# Altium PCB pcb.PcbDoc
Units mil, origin at the board's own origin, x right, y up, seen from the top; angles counter-clockwise.
Board outline 3228.88 x 3228.88 mil, 2 copper layers (Top Layer, Bottom Layer); 53 components, 59 nets, 259 pads, 127 vias.
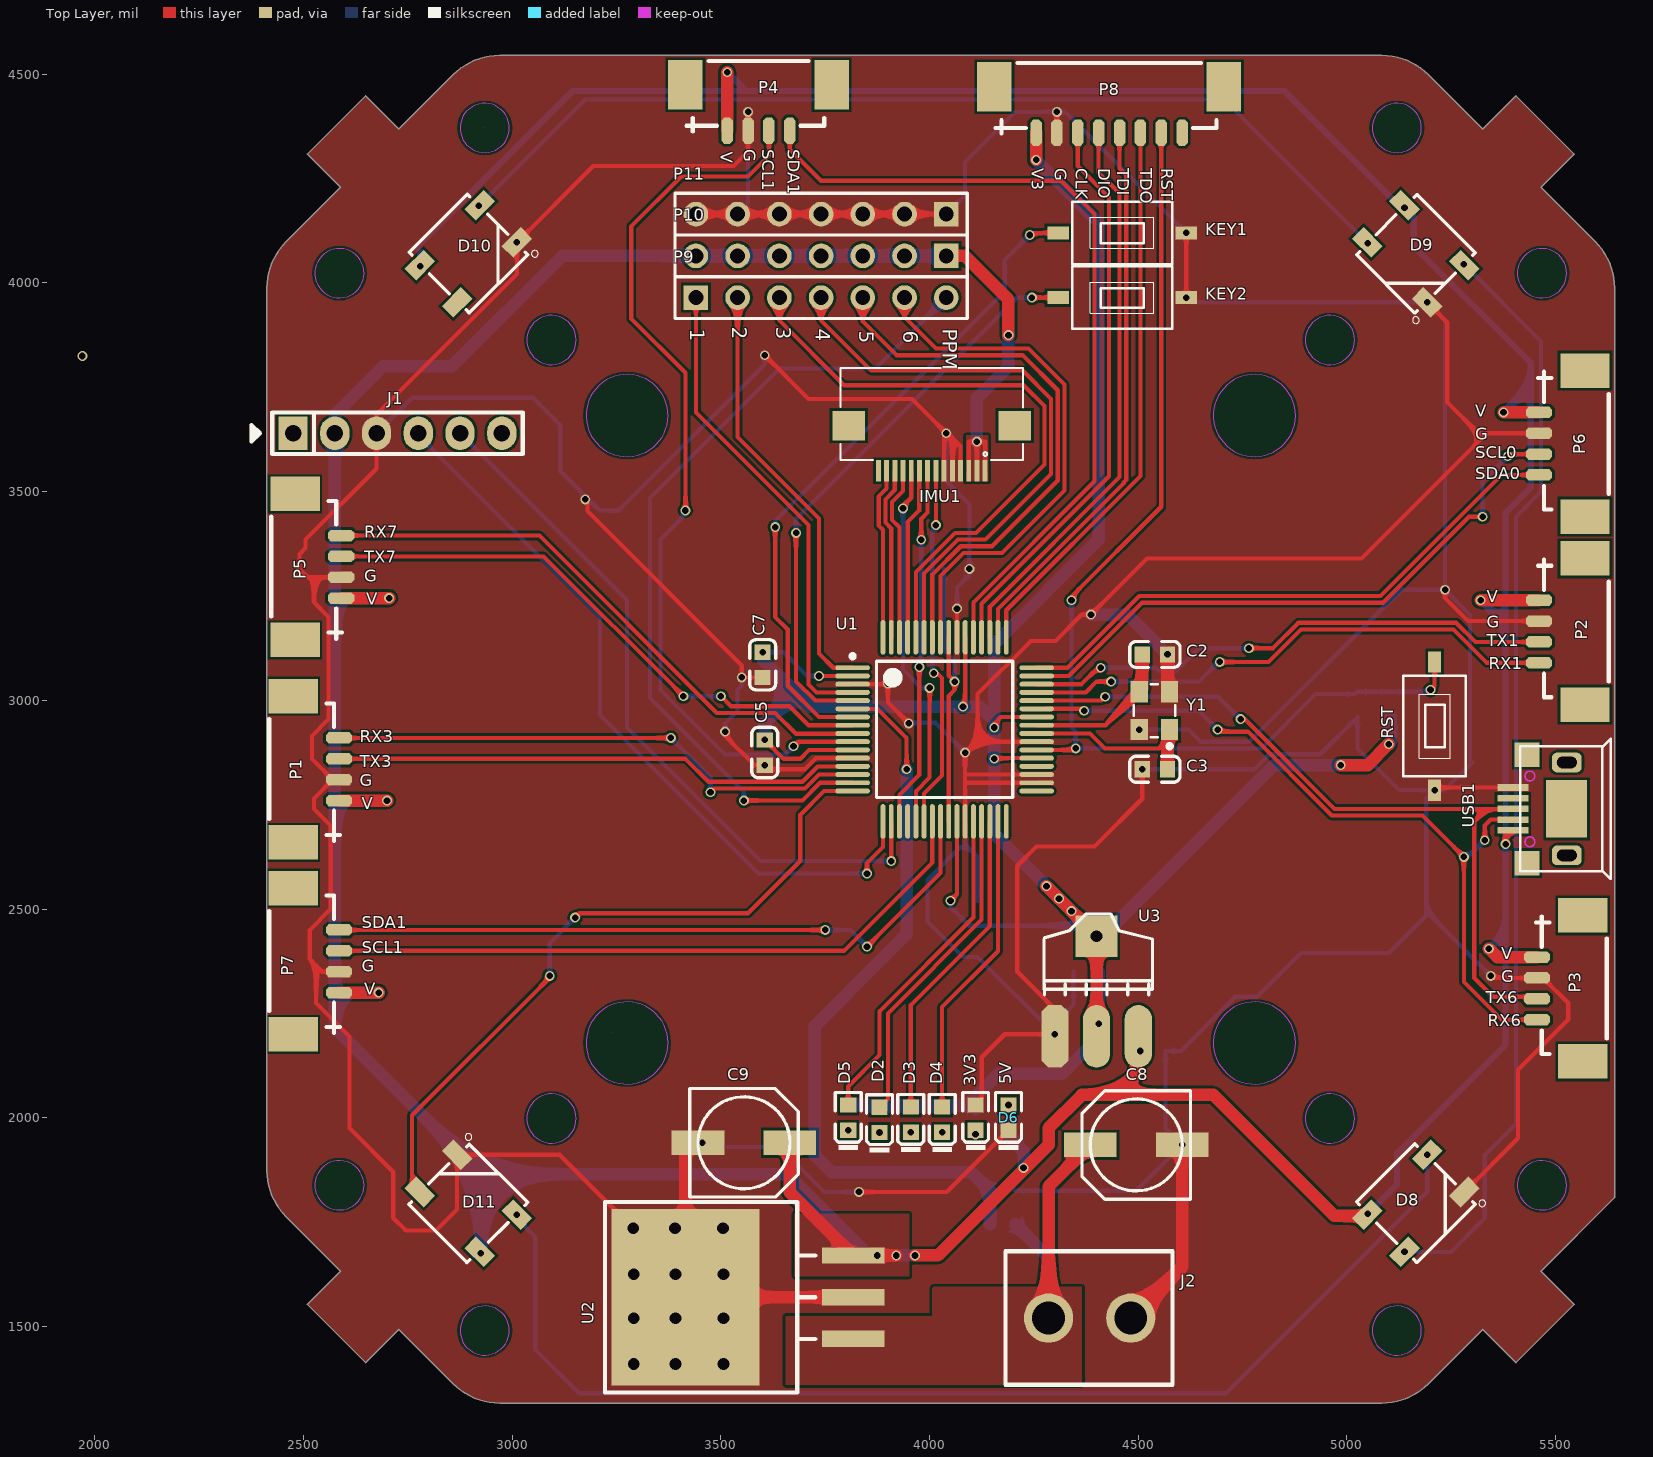
[diagram p0: Top Layer view]
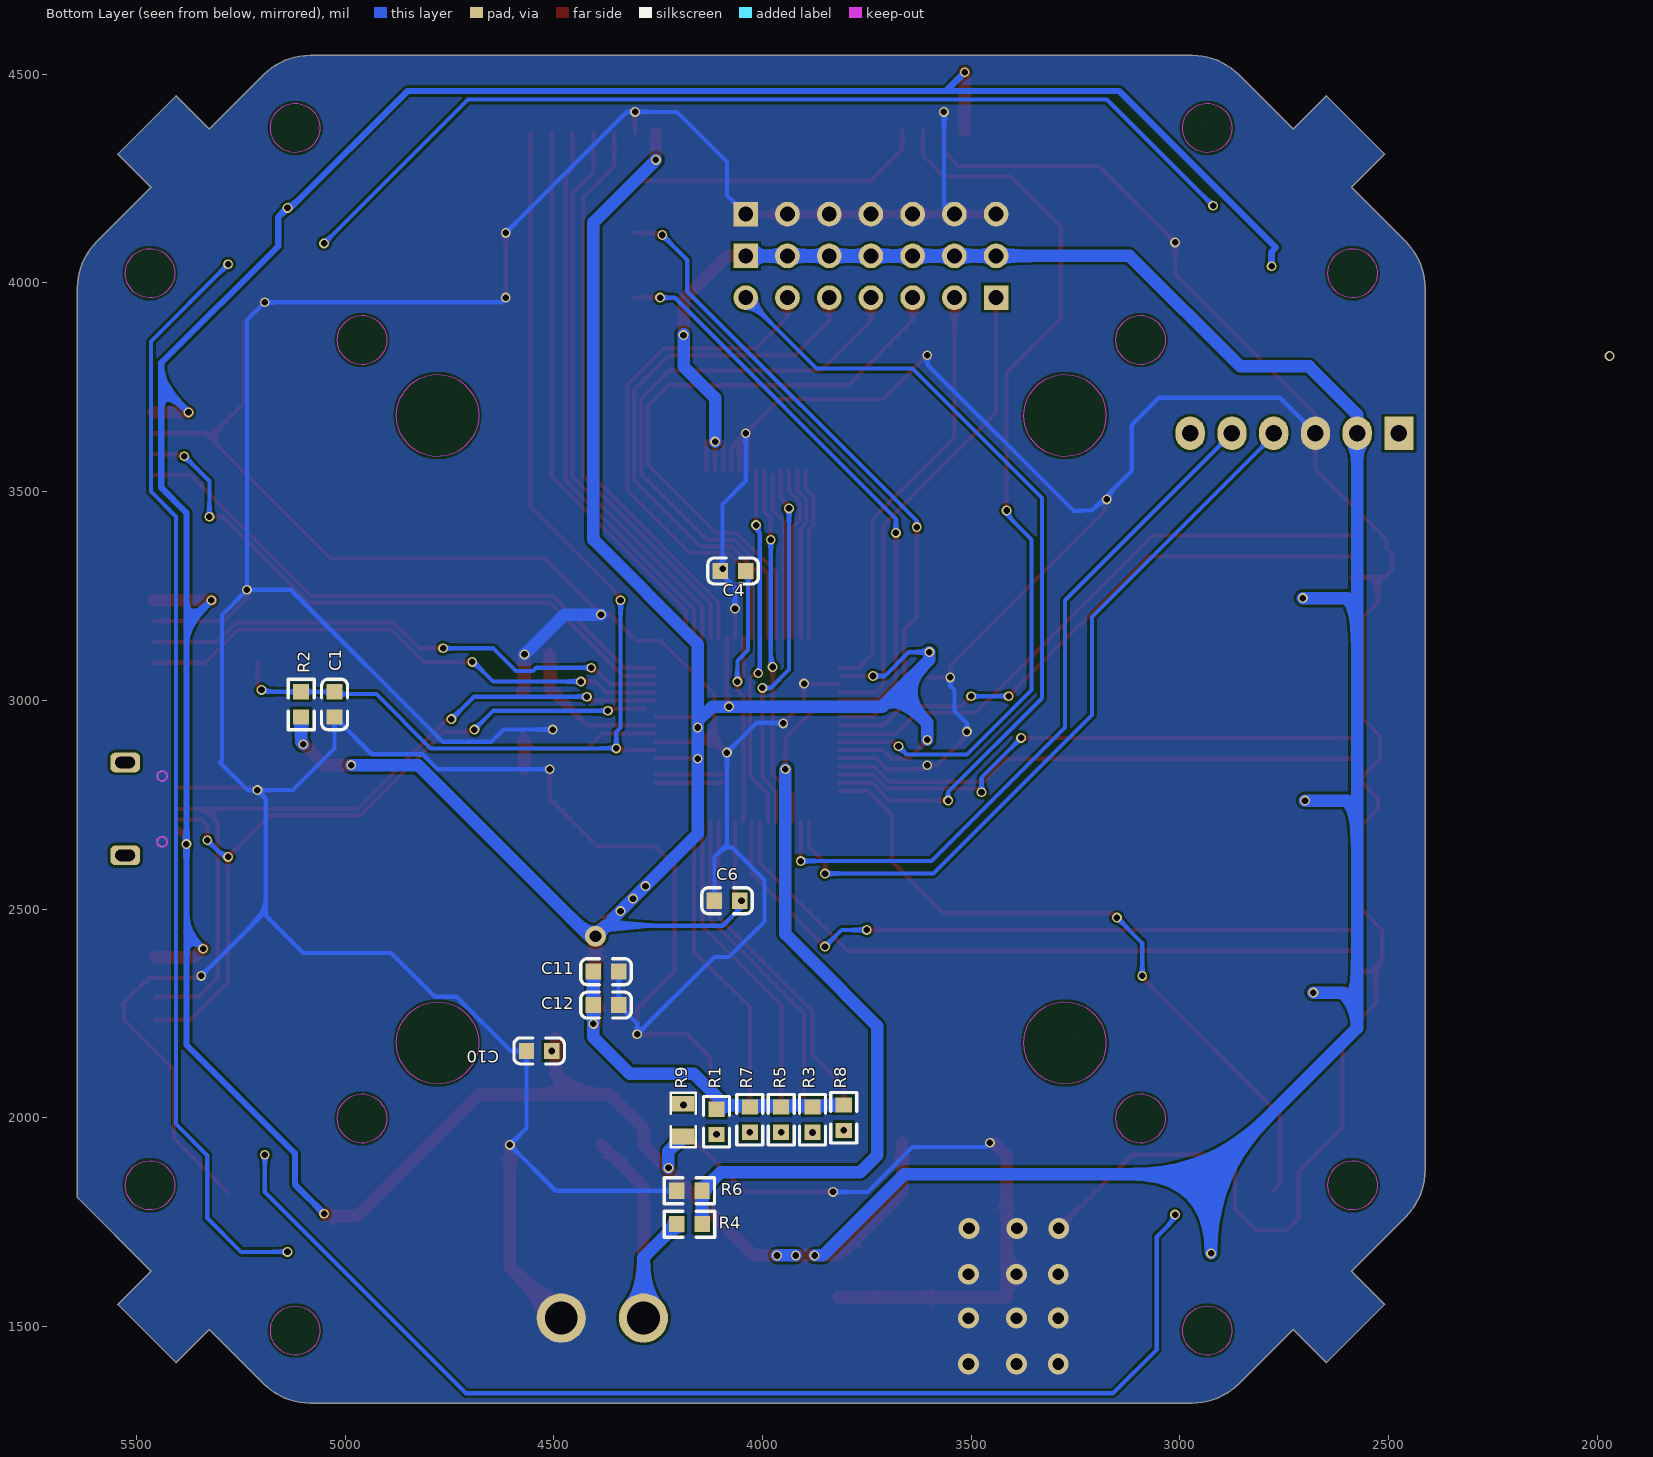
[diagram p1: Bottom Layer view, seen from below]
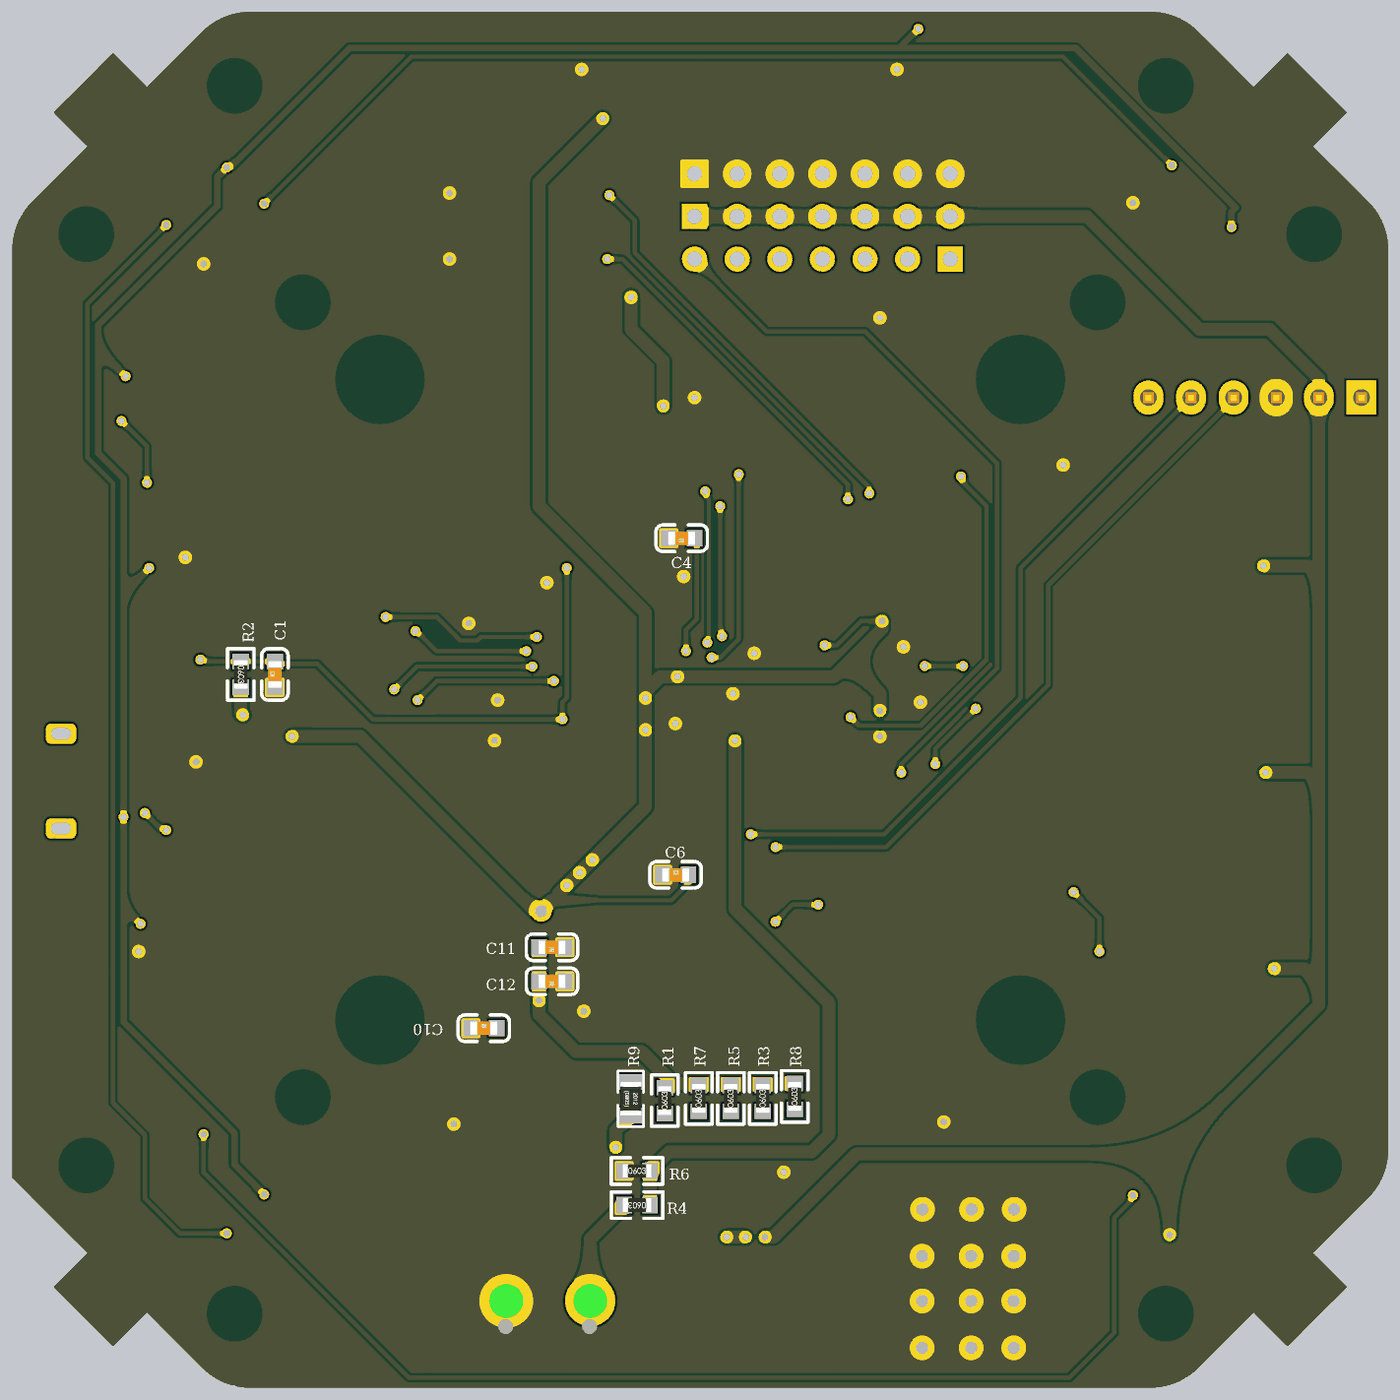
[diagram p2: 3D render of the assembled board from below, using the file's embedded part models]

## Layer stack, top to bottom
Top Solder: solder mask 0.4, Solder Resist, Dk 3.5
Top Layer: signal copper 1.4
Dielectric 1: dielectric 12.6, FR-4, Dk 4.8
Bottom Layer: signal copper 1.4
Bottom Solder: solder mask 0.4, Solder Resist, Dk 3.5

## Board outline
2509.3,1552.63 cw(c2509.49,1552.82) 2509.3,1553 2588.62,1632.33 2458.47,1762.48 cw(c2570.01,1874.02) 2412.27,1874.02 2412.27,3987.66 cw(c2570.01,3987.66) 2458.47,4099.2 2588.62,4229.35 2509.3,4308.68 cw(c2509.49,4308.86) 2509.3,4309.05 2648.5,4448.25 cw(c2648.68,4448.06) 2648.87,4448.25 2728.19,4368.93 2858.34,4499.08 cw(c2858.53,4498.89) 2858.39,4499.12 cw(c2969.89,4387.53) 2969.89,4545.28 5083.52,4545.28 cw(c5083.52,4387.53) 5195.07,4499.08 5325.22,4368.92 5404.54,4448.25 cw(c5404.73,4448.06) 5404.92,4448.25 5544.11,4309.05 cw(c5543.92,4308.86) 5544.19,4308.86 cw(c5543.92,4308.86) 5544.11,4308.68 5464.79,4229.35 5594.94,4099.2 cw(c5483.4,3987.66) 5641.14,3987.66 5641.14,1808.79 cw(c5640.88,1808.79) 5641.07,1808.61 5464.79,1632.33 5544.11,1553 cw(c5543.92,1552.82) 5544.19,1552.82 cw(c5543.92,1552.82) 5544.11,1552.63 5404.92,1413.44 cw(c5404.73,1413.62) 5404.54,1413.44 5325.22,1492.76 5195.07,1362.6 cw(c5083.52,1474.15) 5083.52,1316.4 2969.89,1316.4 cw(c2969.89,1474.15) 2858.35,1362.6 2728.19,1492.76 2648.87,1413.44 cw(c2648.68,1413.62) 2648.5,1413.44
cut-out: 3240,2205
cut-out: 2890,4410
cut-out: 2934.02,4371.5
cut-out: 2934.02,4371.5
cut-out: 2934.02,4371.5

## Design rules (kind name [scope] priority, off if disabled: settings)
Clearance [All] p1: gap=6 ignorepadtopadclearanceinfootprint=TRUE except(0: Text-Text)
ComponentClearance [All] p1: gap=0 collisioncheckmode=3 verticalgap=0 showdistances=FALSE
MinimumSolderMaskSliver [All] p1: minsoldermaskwidth=1
PolygonConnect [All] p1: connectstyle=Direct reliefconductorwidth=10 reliefentries=4 polygonreliefangle="90 Angle" airgapwidth=10
RoutingVias [All] p1: holewidth=23.62 width=23.62 viastyle="Through Hole" minholewidth=15.75 minwidth=23.62 maxholewidth=100 maxwidth=100
SilkToSilkClearance [All] p1: silktosilkclearance=0
SilkToSolderMaskClearance [IsPad] p1: minsilkscreentomaskgap=0 clearancetoexposedcopper=TRUE
SolderMaskExpansion [All] p1: expansion=4
UnRoutedNet [All] p1: checkbadconnections=TRUE
Width [All] p1: maxlimit=100 minlimit=6 preferedwidth=10 minimp=50.000000 maximp=50.000000 favimp=50.000000
25 further rules are at their usual default settings.

## Classes and differential pairs
component class 电源: C8 C9 C10 C11 C12 D6 D8 D9 D10 D11 J2 R9 U2 U3
component class TM4C123GH6PM_1: C1 C2 C3 C4 C5 C6 C7 D1 D2 D3 D4 D5 IMU1 J1 KEY1 KEY2 P1 P2 P3 P4 P5 P6 P7 P8 P9 P10 P11 R1 R2 R3 R4 R5 R6 R7 R8 RST U1 USB1 Y1 Y?

## Components (designator, comment, footprint, x,y, rotation, side; value= is the part's Value field where it differs from the comment)
C1 "100nF" 0603_C 5025,2990.31 r90 bottom
C2 "22pF" 0603_C 4539.69,3110 r0 top
C3 "22pF (220) 5% 50V" 0603_C 4539.69,2835 r180 top
C4 "100nF (104) 10% 50V" 0603_C 4070.31,3310 r0 bottom
C5 "100nF" 0603_C 3605,2875 r90 top
C6 "100nF" 0603_C 4084.68,2520 r180 bottom
C7 "100nF" 0603_C 3600,3085.31 r90 top
C8 "470uF" CC6.56.5 4495,1935 r0 top
C9 "470uF" CC6.56.5 3555.24,1940 r180 top
C10 "10uF" 0603_C 4534.69,2160 r180 bottom
C11 "10uF" 0603_C 4374.69,2350 r0 bottom
C12 "100nF" 0603_C 4374.69,2270 r0 bottom
D1 "白灯 0603" 0603_LED_S1 4110.21,2000.31 r90 top
D2 "红灯 0603" 0603_LED_S1 3880,1995 r90 top
D3 "绿灯 0603" 0603_LED_S1 3955,1995.31 r90 top
D4 "蓝灯 0603" 0603_LED_S1 4030,1995.31 r90 top
D5 "黄灯 0603" 0603_LED_S1 3805,2000.31 r90 top
D6 "蓝灯 0603" 0603_LED_S1 4188.95,2000.31 r90 top
D8 "WS2812B" WS2812B 5165,1795 r225 top locked
D9 "WS2812B" WS2812B 5165,4070 r135 top locked
D10 "WS2812B" WS2812B 2895,4070 r225 top locked
D11 "WS2812B" WS2812B 2895,1795 r315 top locked
IMU1 "FPC-0.5-14" FPC-0.5-14 4005.16,3550 r180 top
J1 "HDR1x6" PIN-6-2.54-1.0 2725,3640 r0 top
J2 "HDR1x2" Head_Small 4383.43,1520 r270 top
KEY1 "KEY_M" KEY_SOP3625 4307.91,4120 r0 top
KEY2 "KEY_M" KEY_SOP3625 4307.91,3965 r0 top
P1 "MOLEX" "1.25 molex" 2530,2835 r270 top
P2 "MOLEX" "1.25 molex" 5515,3165 r90 top
P3 "MOLEX" "1.25 molex" 5510,2310 r90 top
P4 "MOLEX" "1.25 molex" 3590,4420 r180 top
P5 "MOLEX" "1.25 molex" 2535,3320 r270 top
P6 "MOLEX" "1.25 molex" 5515,3615 r90 top
P7 "MOLEX" "1.25 molex" 2530,2375 r270 top
P8 "MOLEX" "1.25 molex -8" 4330,4415 r180 top
P9 "Header 7" HDR1X7 3440,3965 r0 top
P10 "Header 7" HDR1X7 4040,4065 r180 top
P11 "Header 7" HDR1X7 4040,4165 r180 top
R1 "470Ω (4700) ±1%" 0603_R 4110,1990.31 r90 bottom
R2 "10KΩ" 0603_R 5105,2990.32 r270 bottom
R3 "470Ω" 0603_R 3880,1995.31 r90 bottom
R4 "10KΩ" 0603_R 4174.68,1745 r0 bottom
R5 "470Ω" 0603_R 3955,1995.31 r90 bottom
R6 "1KΩ" 0603_R 4175,1825 r180 bottom
R7 "470Ω" 0603_R 4030,1995.31 r90 bottom
R8 "470Ω" 0603_R 3805,2000 r90 bottom
R9 "1K" 0805_R 4190,1994.37 r270 bottom
RST "KEY_M" KEY_SOP3625 5210,2785 r90 top
U1 "TM4C123GH6PMT7R" PM0064A_M 4036,2930.5 r0 top locked value=Value
U2 "UCC283-3_KTT_3" TO-263-3 3415,1570 r90 top value=Value
U3 "AMS1117-3.3" AMS1117 4299.97,2195.06 r0 top
USB1 "USB-AB" "USB_AB - 5S - B" 5611.42,2740 r270 top
Y1 "25Mhz" XTAL3225 4575,2930.08 r90 top

## Footprints (in the part's own frame and the unit in brackets; to place one, negate y for a bottom-side part, rotate by r counter-clockwise, add the part's x,y. Pads: shape width x height; smd on the part's side, far side on the other; paste and mask are expansions set on the pad)
"1.25 molex" [mm]
  oct 0.7x1.6 smd: 1(1.905,1.397) 2(0.635,1.397) 3(-0.635,1.397) 4(-1.905,1.397)
  rect 2.1x3 smd: 5(-4.445,-1.397) 6(4.445,-1.397)
  silkscreen extent -4,-2.85 4.37,1.45, body extent -5.45,-2.88 5.45,0.95, height 2.8
"1.25 molex -8" [mm]
  oct 0.7x1.6 smd: 1(1.905,1.397) 2(0.635,1.397) 3(-0.635,1.397) 4(-1.905,1.397) 5(-3.175,1.397) 6(-4.445,1.397) 7(-5.715,1.397) 8(-6.985,1.397)
  rect 2.1x3 smd: 9(-9.525,-1.397) 10(4.445,-1.397)
  silkscreen extent -9.08,-2.85 4.37,1.45, body extent -10.54,-2.88 5.45,0.95, height 2.8
0603_C [mm]
  rect 0.93x0.98 smd: 1(-0.77,0) 2(0.77,0)
  silkscreen extent -1.53,-0.79 1.54,0.79, body extent -0.8,-0.4 0.8,0.4, height 0.3
0603_LED_S1 [mm]
  rect 0.93x0.98 smd: A(0.77,0) K(-0.77,0)
  silkscreen extent -1.98,-0.79 1.54,0.79, body extent -0.8,-0.4 0.8,0.4, height 0.6
0603_R [mm]
  rect 0.93x0.98 smd: 1(-0.77,0) 2(0.77,0)
  silkscreen extent -1.54,-0.79 1.54,0.79, body extent -0.85,-0.4 0.85,0.4, height 0.56
0805_R [mm] "SMD, 0805"
  rect 0.95x1.4 smd: 1(-1,0) 2(1,0)
  silkscreen extent -1.65,-0.76 1.65,0.76, body extent -1,-0.62 1,0.63, height 0.45
AMS1117 [mil]
  oct 65x150 smd: 1(0.03,-0.06)
  oval 65x150 smd: 2(100.03,-0.06) 3(200.03,-0.06)
  rect 100x100 smd: 4(100.03,239.94)
  silkscreen extent -26,100 234,293
CC6.56.5 [mm] "SMD;W:6.5mm;L:6.5mm;"
  rect 3.2x1.5 smd: 1(-2.794,0) 2(2.8,0)
  silkscreen extent -3.3,-3.3 3.3,3.3
FPC-0.5-14 [mm]
  rect 0.3x1.3 smd: 1(-3.25,0) 2(-2.75,0) 3(-2.25,0) 4(-1.75,0) 5(-1.25,0) 6(-0.75,0) 7(-0.25,0) 8(0.25,0) 9(0.75,0) 10(1.25,0) 11(1.75,0) 12(2.25,0) 13(2.75,0) 14(3.25,0)
  rect 2x1.8 smd: Z1(-5.05,-2.75) Z2(5.05,-2.75)
  silkscreen extent -5.55,-6.26 5.55,-0.65
HDR1X7 [mm] "Connector; Header; 7 Position"
  rect 1.5x1.5 hole 0.9: 1(0,0)
  round 1.5 hole 0.9: 2(2.54,0) 3(5.08,0) 4(7.62,0) 5(10.16,0) 6(12.7,0) 7(15.24,0)
  silkscreen extent -1.27,-1.27 16.51,1.27
Head_Small [mm]
  round 3 hole 2: 1(0,-2.5) 2(0,2.5)
  silkscreen extent -4.07,-5.11 4.06,5.05, body extent -3.98,-4.96 4.02,5.04, height 1.5
KEY_SOP3625 [mm]
  rect 1.3x0.8 smd: 1(0,0) 2(7.8,0)
  silkscreen extent 0.85,-1.9 6.95,1.9
PIN-6-2.54-1.0 [mil] "Pin Header"
  rect 70x80 hole 39.37: 1(-250,0)
  oval 70x80 hole 39.37: 2(-150,0) 3(-50,0) 4(50,0) 5(150,0) 6(250,0)
  silkscreen extent -350,-50 300,50, body extent -300,-50 300,50, height 398
PM0064A_M [mm]
  oval 2.1x0.3 smd paste-0.102 mask+0.051: 1(-5.6,3.75) 2(-5.6,3.25) 3(-5.6,2.75) 4(-5.6,2.25) 5(-5.6,1.75) 6(-5.6,1.25) 7(-5.6,0.75) 8(-5.6,0.25) 9(-5.6,-0.25) 10(-5.6,-0.75) 11(-5.6,-1.25) 12(-5.6,-1.75) 13(-5.6,-2.25) 14(-5.6,-2.75) 15(-5.6,-3.25) 16(-5.6,-3.75) 33(5.6,-3.75) 34(5.6,-3.25) 35(5.6,-2.75) 36(5.6,-2.25) 37(5.6,-1.75) 38(5.6,-1.25) 39(5.6,-0.75) 40(5.6,-0.25) 41(5.6,0.25) 42(5.6,0.75) 43(5.6,1.25) 44(5.6,1.75) 45(5.6,2.25) 46(5.6,2.75) 47(5.6,3.25) 48(5.6,3.75)
  oval 0.3x2.1 smd paste-0.102 mask+0.051: 17(-3.75,-5.6) 18(-3.25,-5.6) 19(-2.75,-5.6) 20(-2.25,-5.6) 21(-1.75,-5.6) 22(-1.25,-5.6) 23(-0.75,-5.6) 24(-0.25,-5.6) 25(0.25,-5.6) 26(0.75,-5.6) 27(1.25,-5.6) 28(1.75,-5.6) 29(2.25,-5.6) 30(2.75,-5.6) 31(3.25,-5.6) 32(3.75,-5.6) 49(3.75,5.6) 50(3.25,5.6) 51(2.75,5.6) 52(2.25,5.6) 53(1.75,5.6) 54(1.25,5.6) 55(0.75,5.6) 56(0.25,5.6) 57(-0.25,5.6) 58(-0.75,5.6) 59(-1.25,5.6) 60(-1.75,5.6) 61(-2.25,5.6) 62(-2.75,5.6) 63(-3.25,5.6) 64(-3.75,5.6)
  silkscreen extent -5.72,-4.15 4.15,4.57
TO-263-3 [mm] "TO-263, 3PIN"
  rect 1x3.8 smd: 1(-2.54,-10.2) 2(0,-10.2) 3(2.54,-10.2)
  rect 10.75x9 smd: 4(0,0)
  silkscreen extent -5.8,-7.9 5.8,4.9, body extent -5.08,-11.52 5.08,3.92, height 4.69
"USB_AB - 5S - B" [mm]
  rect 0.4x1.9 smd: 1(1.3,-5.436) 2(0.65,-5.436) 3(0,-5.436) 4(-0.65,-5.436) 5(-1.3,-5.436)
  rrect50% 1.2x1.8 hole 0.7 slot 1.2 at 90 deg: 6(2.825,-2.15) 7(-2.825,-2.15)
  rect 1.5x1.5 smd: 8(-3.302,-4.572) 9(3.302,-4.572)
  rect 3.5x2.5 smd: 9(0,-2.159)
  Keep-Out Layer circle w0.102: c-2,-4.4 r0.3
  Keep-Out Layer circle w0.102: c2,-4.4 r0.3
  silkscreen extent -4.26,-5 4.26,0.51
WS2812B [mm]
  rect 1.651x1 smd: 1(2.577,-1.6) 2(2.577,1.6) 3(-2.577,1.6) 4(-2.577,-1.6)
  silkscreen extent -3.06,-2.62 2.54,3.06
XTAL3225 [mm]
  rect 1.3x1.05 smd: 1(0,0) 2(2.3,0) 3(2.3,1.85) 4(0,1.85)
  silkscreen extent -1.14,-0.33 2.74,2.17

## Part data
C1 C4 C5 C6 C7 C12: library part "0603 100nF (104) 10% 50V", "贴片电容", Package=0603, SuppliersPartNumber=C14663, ComponentLink1Description=供应商, ComponentLink1URL=http://www.szlcsc.com/product/details_15331.html, Supplier=LC
C2 C3: library part "0603 22pF (220) 5% 50V", "贴片电容", Package=0603, SuppliersPartNumber=C1653, ComponentLink1Description=供应商, ComponentLink1URL=http://www.szlcsc.com/product/details_2005.html, Supplier=LC
C8 C9: library part CAP
C10 C11: library part "0603 10uF (106) 10% 10V", "贴片电容", Package=0603, SuppliersPartNumber=C19702, ComponentLink1Description=供应商, ComponentLink1URL=http://www.szlcsc.com/product/details_20411.html, Supplier=LC
D1: library part "0603 白灯", "发光二极管", Package=0603, SuppliersPartNumber=C2290, ComponentLink1Description=供应商, ComponentLink1URL=http://www.szlcsc.com/product/details_2663.html, Supplier=LC
D2: library part "0603 红灯", "发光二极管", Package=0603, SuppliersPartNumber=C2286, ComponentLink1Description=供应商, ComponentLink1URL=http://www.szlcsc.com/product/details_2659.html, Supplier=LC
D3: library part "0603 绿灯", "发光二极管", Package=0603, SuppliersPartNumber=C72043, ComponentLink1Description=供应商, ComponentLink1URL=http://www.szlcsc.com/product/details_73152.html, Supplier=LC
D4 D6: library part "0603 蓝灯", "发光二极管", Package=0603, SuppliersPartNumber=C72041, ComponentLink1URL=http://www.szlcsc.com/product/details_73150.html, Supplier=LC
  D4: ComponentLink1Description=供应商
  D6: ComponentLink1Description=供应
D5: library part "0603 黄灯", "发光二极管", Package=0603, SuppliersPartNumber=C72038, ComponentLink1Description=供应商, ComponentLink1URL=http://www.szlcsc.com/product/details_73147.html, Supplier=LC
D8 D9 D10 D11: "Intelligent Control Led Integrated Light Source Pack Of 10", Package=None, Availability=Unavailable, MF="Seeed Technology", MP=WS2812B, Price=None, SnapEDA_Link=https://www.snapeda.com/parts/WS2812B/Seeed%20Technology%20Co.%2C%20Ltd/view-part/?ref=snap
IMU1: "FFC / FPC Board Connector, WR-FPC Series, Surface Mount, Receptacle, 14, Bottom, 0.5 mm", Package=None, Availability=Unavailable, MF="Wurth Electronics", MP=687114149022, Price=None, SnapEDA_Link=https://www.snapeda.com/parts/687114149022/Wurth%20Electronics%20Inc./view-part/?ref=snap
J1 J2: "Connector"
P1 P2 P3 P4 P5 P6 P7: library part "Header 4", LatestRevisionDate=17-Jul-2002, LatestRevisionNote="Re-released for DXP Platform.", Publisher="Altium Limited"
P8: library part "Header 8", LatestRevisionDate=17-Jul-2002, LatestRevisionNote="Re-released for DXP Platform.", Publisher="Altium Limited"
P9 P10 P11: "Header, 7-Pin", LatestRevisionDate=17-Jul-2002, LatestRevisionNote="Re-released for DXP Platform.", Publisher="Altium Limited"
R1 R3 R5 R7 R8: library part "0603 470Ω (4700) 1%", "贴片电阻", Package=0603, SuppliersPartNumber=C23179, ComponentLink1Description=供应商, ComponentLink1URL=http://www.szlcsc.com/product/details_23906.html, Supplier=LC
R2 R4: library part "0603 10KΩ (1002) 1%", "贴片电阻", Package=0603, SuppliersPartNumber=C25804, ComponentLink1Description=供应商, ComponentLink1URL=http://www.szlcsc.com/product/details_26547.html, Supplier=LC
R6: library part "0603 1KΩ (1001) 1%", "贴片电阻", Package=0603, SuppliersPartNumber=C21190, ComponentLink1Description=供应商, ComponentLink1URL=http://www.szlcsc.com/product/details_21904.html, Supplier=LC
R9: library part R
U1: "Imported", Alternate_PartNumber=TM4C123GH6PMT, Manufacturer="Texas Instruments", PartNumber=TM4C123GH6PMTR, CompType=IC, MountType=SMT, PackageReference=PM0064A, PIN_COUNT=64, RefDes=RefDes, RoHS=Y, TYPE=TYPE
U2: "Imported", Manufacturer="Texas Instruments", Manufacturer_Part_Number=ucc283-3_ktt_3, PACKAGE_DESIGNATOR=KTT, Datasheet_URL=http://www.ti.com/lit/gpn/UCC283-3, FAMILY_NAME="SINGLE CHANNEL LDO", GENERIC_PART_NUMBER=UCC283-3, INDUSTRY_STD_PKG_TYPE=DDPAK/TO-263, PIN_COUNT=3, RefDes=RefDes, TYPE=Type, Vendor="Texas Instruments"
U3: library part AMS1117
USB1: "MicroUSB"
Y1: library part XTAL_3225, "3225贴片无源晶振"

## Via types
v1: diameter 23.62, hole 15.75, Top Layer to Bottom Layer, 114 vias
v2: diameter 50, hole 28, Top Layer to Bottom Layer, 13 vias

## Nets (pads, with @x,y where several pads share a name; then routed paths per layer and width w, separated by ;. In a path a pad name is that pad's centre, name@x,y a point inside that pad or via, vN(x,y) a via of type N, cw(c..) or ccw(c..) an arc to the next point about the centre after c; other vN are vias at no path point)
3V3: C5.2 C6.2 C7.2 C11.2 C12.2 P8.1 R1.2 R2.2 R3.2 R5.2 R7.2 R8.2 U1.2 U1.11 U1.26 U1.37 U1.42 U1.54 U3.2 U3.4 | length 6548.7
  Top Layer w10: v1(3605,2905.31) 3650.31,2860 3690,2860 3711.29,2881.29 U1.11 ; v1(3734.97,3058.45) U1.2@3812.43,3058.45 ; v1(4050,2520) 4065.53,2535.53 U1.26 ; v1(4080,2985) 4085.21,2990.21 U1.54 ; v1(4155,2860) 4160,2860 4161.6,2861.6 U1.37 ; v1(4155,2934.97) 4155,2945 4170.03,2960.03 U1.42
  Top Layer w30: v1(4255,4295) P8.1 ; v1(4280,2555) v1(4310,2525) v2(4400,2435) U3.2@4400,2225 ; v1(4985,2845) 5050,2845 v1(5100,2895)
  Bottom Layer w10: v1(3600,3115.63) 3649.37,3115.63 3706.55,3058.45 v1(3734.97,3058.45) ; v1(4050,2520) 4050,2505 4095,2460 4375,2460
  Bottom Layer w30: v1(3600,3115.63) 3600,3097.81 3678.31,3019.5 ; v1(3605,2905.31) 3605,2946.18 3678.31,3019.5 ; R8.2 R1.2@4100.31,2030.32 ; R1.2 R1.2@4100.31,2030.32 ; v1(4255,4295) 4405,4145 4405,3385 4155,3135 4155,2950 ; 4360,2475 v1(4280,2555) 4155,2680 v1(4155,2860) v1(4155,2934.97) 4155,2950 ; 4375,2460 v2(4400,2435) 4415,2435 4825,2845 v1(4985,2845) ; C11.2 C12.2 v1(4405,2225) 4405,2192.61 4317.39,2105 4164.37,2105 4100.31,2040.94 R1.2@4100.31,2030.32 ; v1(5100,2895) 5105,2900 R2.2 ; 3678.31,3019.5 3712.81,2985 v1(4080,2985) 4120,2985 4155,2950
  other v1: 4340,2495
5V: C9.1 C10.2 D8.1 D9.1 D10.1 D11.1 IMU1.1 IMU1.2 IMU1.3 J1.2 P1.1 P2.1 P3.1 P4.1 P5.1 P6.1 P7.1 P10.1 P10.2 P10.3 P10.4 P10.5 P10.6 P10.7 R9.2 U2.3 U3.3 USB1.1 | length 14665.1
  Top Layer w10: IMU1.3 4093.74,3619.84 v1(4113.43,3619.84) ; IMU1.2 v1(4113.43,3619.84) ; IMU1.1 4133.11,3619.84 v1(4113.43,3619.84)
  Top Layer w15: v1(5380,2655.7) 5380,2671.4 USB1.1
  Top Layer w30: P7.1 v1(2680,2300) ; P1.1 v1(2700,2760) ; P5.1 v1(2705,3245) ; P4.1 v1(3515,4505) ; C9.1 3665.24,1821.34 U2.3 v1(3875,1670) v1(3920,1670) ; v1(3965,1670) 4020,1670 4285,1935 4285,1975 4365,2055 4445,2055 ; P10.1 4084.27,4065 4188.95,3960.32 v1(4188.95,3875) ; U3.3@4495,2190 4495,2105 4445,2055 ; D8.1@5045.92,1765 4970,1765 4680,2055 4445,2055 ; v1(5320,3240) P2.1 ; v1(5340,2405) 5360,2385 P3.1 ; v1(5375,3690) P6.1
  Bottom Layer w15: v1(2780,4040) 2780,4075 2770,4085 3145,4460 3560,4460 ; v1(3515,4505) 3560,4460 ; v1(5050,1770) 5120,1840 5120,1915 5380,2175 5380,2445 ; v1(5320,3240) 5380,3180 ; v1(5340,2405) 5380,2445 ; v1(5375,3690) 5440,3755 ; 3560,4460 4850,4460 5130,4180 v1(5137.8,4180) 5160,4157.8 5160,4088.5 5440,3808.5 5440,3755 ; 5380,2445 v1(5380,2655.7) 5380,3180 ; 5380,3180 5380,3450 5440,3510 5440,3755
  Bottom Layer w30: v1(2680,2300) 2610,2300 2575,2265 ; v1(2700,2760) 2600,2760 2575,2735 ; v1(2705,3245) 2600,3245 2575,3220 ; v1(2925,1675) 2925,1865 ; v1(3875,1670) 3855,1670 3660,1865 2925,1865 ; v1(3920,1670) v1(3965,1670) ; P10.1 P10.2 P10.3 P10.4 P10.5 P10.6 P10.7 3120,4065 2855,3800 2690,3800 2575,3685 J1.2 2575,3220 ; v1(4113.43,3619.84) 4113.43,3724.79 4188.95,3800.31 v1(4188.95,3875) 4190,3876.05 v1@4188.95,3877.1 ; R9.2 4225,1920 v1(4225,1880) ; 2575,2265 2575,2735 ; 2575,2265 2575,2215 2925,1865 ; 2575,2735 2575,3220
  other v1: 4504.37,2160
ADC_IN: R4.1 R6.2 U1.6 | length 1784.7
  Top Layer w10: U1.6 3875.56,2979.71 3945,2910.27 v1(3945,2835)
  Bottom Layer w30: v1(3945,2835) 3945,2440 3890,2385 3725,2220 3725,1910 3765,1870 4099.68,1870 R6.2 4144.68,1745.31 R4.1
CS_AK: IMU1.9 U1.61 | length 400.5
  Top Layer w10: U1.61 3947.42,3427.42 3975,3455 IMU1.9@3975,3540
CS_ICM: IMU1.12 U1.63 | length 414.2
  Top Layer w10: U1.63 3908.05,3411.74 3894,3425.79 3894,3481.63 3916.57,3504.2 IMU1.12
CS_SP: IMU1.11 U1.62 | length 417.3
  Top Layer w10: U1.62 3927.73,3414.69 3910,3432.42 3910,3475 3936.26,3501.26 IMU1.11
GND: C1.1 C2.2 C3.2 C4.2 C5.1 C6.1 C7.1 C8.2 C9.2 C10.1 C11.1 C12.1 D1.A D6.K D8.3 D9.3 D10.3 D11.3 IMU1.4 IMU1.5 IMU1.6 J1.3 J2.2 KEY1.2 KEY2.2 P1.2 P2.2 P3.2 P4.2 P5.2 P6.2 P7.2 P8.2 P11.1 P11.2 P11.3 P11.4 P11.5 P11.6 P11.7 R6.1 RST.1 U1.3 U1.12 U1.27 U1.34 U1.35 U1.39 U1.55 U2.2 U2.4 U3.1 USB1.5 Y1.2 Y1.4 | length 24860.4
  Top Layer w10: P1.2@2575,2810 P1.2 ; P7.2 2545,2350 2530,2365 ; P5.2 2525,3295 ; v1@3180,3475 3180,3453.89 3550,3083.89 v1(3550,3055) C7.1 ; v2(3290,1735) 3113.72,1911.28 D11.3 2867.8,1780.6 2817.2,1730 2745,1730 2715,1760 2715,1870 2610,1975 2610,2195 2530,2275 2530,2365 ; P11.7 P11.6 P11.5 P11.4 P11.3 P11.2 P11.1 ; v1(3510,2925) 3510,2915 3580.31,2844.69 v1(3605,2844.69) 3614.69,2835 3701.29,2835 3727.89,2861.6 U1.12 ; v1(3565,4410) P4.2 3565,4315 3530,4280 3194.08,4280 v1(3011.28,4097.2) 3011.28,4021.28 2675,3685 J1.3 2675,3555 2505,3385 2505,3365 2490,3350 2490,3315 2510,3295 2525,3295 ; v1(3605,3827) 3709.75,3722.25 3957.75,3722.25 v1@4034.69,3645.31 ; U1.3 v1@3900,3038.77 ; v1(3830.74,1822.2) 4041.15,1822.2 D6.K ; v1(3900,3040) v1@3900,3038.77 ; v1(3950,2945) 3900,2995 v1@3900,3038.77 ; IMU1.6 v1@4034.69,3645.31 ; v1(4040,3640) v1@4034.69,3645.31 ; v1@4041.63,3641.63 4054.37,3628.9 ; IMU1.5 4054.37,3628.9 ; U1.55 v1(4065.53,3220) ; IMU1.4 4074.06,3609.21 4054.37,3628.9 ; U1.27 4085.21,2785.21 4085,2785.42 4085,2800 ; D1.A 4125,2045.42 4125,2145 4180,2200 v1(4300,2200) 4300,2260 4210,2350 4210,2603.78 4256.22,2650 4395,2650 4509.37,2764.37 v1(4509.37,2835) ; U1.34 4087.55,2802.55 4085,2800 ; U1.35 4087.23,2822.23 4085,2820 ; U1.39 4115,2900.97 ; P8.2 v1(4305,4410) ; v1(4615,3965) v1(4615,4120) ; v1(5192.2,3953.72) 5240,3905.92 5240,3715 5325,3630 ; v1(5210,2785) 5216.18,2791.18 USB1.5 ; v1(5235,3265) 5235,3245 5290,3190 P2.2 ; D8.3 5410,1950.92 5410,2115 5530,2235 5530,2275 5470,2335 P3.2 5349.41,2335 v1(5344.41,2340) ; P6.2 5335,3640 5325,3630 ; 2525,3295 2525,3235 2560,3200 2560,2955 2520,2915 2520,2860 2570,2810 2525,2765 2525,2740 2565,2700 2565,2500 2515,2450 2515,2380 2530,2365 ; 4085,2800 4085,2820 ; 4085,2820 4085,2870.97 4115,2900.97 ; 4115,2900.97 4115,3015 4242.5,3142.5 4301.53,3142.5 4364.6,3205.57 v1(4386.62,3205.57) 4521.05,3340 5035,3340 5325,3630
  Top Layer w30: C9.2 3415,1910 U2.4 U2.2 ; J2.2 4605.24,1643.39 C8.2 ; v1(4570,3110) 4570,3025.63 Y1.2
  Bottom Layer w10: J1.3 2760,3725 3050,3725 3115,3660 3115,3550 3210,3455 3235,3455 3235.5,3454.5 3254.5,3454.5 3605,3805 v1(3605,3827) ; v1(3455,1940) 3465,1930 3640,1930 3747.8,1822.2 v1(3830.74,1822.2) ; v1(3510,2925) 3510,2945 3540,2975 3540,3025 3550,3035 v1(3550,3055) ; P11.6 3565,4190 v1(3565,4410) ; v1@3955,2946.18 4013.82,2946.18 v1(4085,2875) 4085,2655.7 4092.22,2648.48 ; v1@4040,3645 v1(4040,3640) 4040,3525 4095.31,3469.69 v1(4095.31,3315) 4095.31,3300.31 4065.53,3270.53 v1(4065.53,3220) ; P11.1 4085,4210 4085,4290 4205,4410 v1(4305,4410) 4325,4410 v1(4615,4120) ; C6.1 4115,2625.7 4092.22,2648.48 ; R6.1 4495,1825 v1(4605,1935) 4565,1975 C10.1 4602.72,2160 4732.52,2289.8 4784.8,2289.8 4890,2395 5100,2395 5190,2485 5190,2494.41 ; C11.1 C12.1 4300,2225.63 v1(4300,2200) 4115,2385 4080,2385 3995,2470 3995,2570 4073.48,2648.48 4092.22,2648.48 ; v1(4502.17,2930.08) 4619.92,2930.08 4649,2901 4766,2901 5130,3265 v1(5235,3265) ; v1(4509.37,2835) 4778.23,2835 4814.23,2871 4936,2871 C1.1 5025,2885 5125,2785 v1(5210,2785) ; v1(4615,3965) 4626.28,3953.72 v1(5192.2,3953.72) 5235,3910.92 v1(5235,3265) ; v1(5344.41,2340) 5190,2494.41 ; 5190,2494.41 5190,2765 v1(5210,2785) ; v1(5210,2785) 5233.78,2785 5300,2851.22 5295,2856.22 5295,3205 v1(5235,3265)
  Bottom Layer w30: v1(4386.62,3205.57) 4474.43,3205.57 v1(4570,3110)
  other v1: 3175,3481.63
  other v2: 3291,1410 3391,1410 3506,1410 3291,1520 3391,1520 3506,1520 3291,1625 3391,1625 3506,1625 3390,1735 3505,1735
ICM_SCK: IMU1.8 U1.19 | length 869.2
  Top Layer w10: U1.19 3927.73,2773.73 3975,2821 3975,3080.63 v1(3975.63,3080) ; v1(3980,3385) 3980,3435 3995.32,3450.32 IMU1.8
  Bottom Layer w10: v1(3975.63,3080) 3980,3084.37 v1(3980,3385)
ICM_SDI: IMU1.7 U1.22 | length 865.1
  Top Layer w10: U1.22 3986.79,2776.98 4029.84,2820.03 4029.84,3053.35 v1@4020,3063.19 ; v1(4015,3420) IMU1.7
  Bottom Layer w10: v1(4010,3065) 4010,3075 4006.47,3078.53 4006.47,3401.47 4015,3410 v1(4015,3420)
ICM_SDO: IMU1.10 U1.21 | length 899.9
  Top Layer w10: v1(3936.26,3460) 3936.26,3466.26 3955.94,3485.94 IMU1.10 ; U1.21 3967.1,2782.1 4000,2815 v1(4000,3030)
  Bottom Layer w10: v1(3936.26,3460) 3936.26,3073.74 3980,3030 v1(4000,3030)
KEY1: KEY1.1 U1.7 | length 1601.7
  Top Layer w10: v1(3630,3415) 3630,3200 3660,3170 3660,3035 3734.97,2960.03 U1.7 ; v1(4240,4115) 4245,4120 KEY1.1
  Bottom Layer w10: v1(3630,3415) 3630,3430 4180,3980 4180,4055 v1(4240,4115)
KEY2: KEY2.1 U1.5 | length 1391.5
  Top Layer w10: v1(3680,3401.25) 3680,3045.64 3726.24,2999.4 U1.5 ; v1(4245,3965) KEY2.1
  Bottom Layer w10: v1(3680,3401.25) 3680,3435 4210,3965 v1(4245,3965)
LED_BLUE: D4.A U1.31 | length 739.9
  Top Layer w10: D4.A 4030,2265 4163.95,2398.95 U1.31
LED_GREEN: D3.A U1.30 | length 762.8
  Top Layer w10: D3.A 3955,2270 4144.27,2459.27 U1.30
LED_RED: D2.A U1.29 | length 786
  Top Layer w10: D2.A 3900,2045.32 3900,2250 4124.58,2474.58 U1.29
LED_YELLOW: D5.A U1.28 | length 803.9
  Top Layer w10: D5.A 3805,2075 3880,2150 3880,2255 4104.5,2479.5 4104.9,2479.5 U1.28
MCU_RST: C1.2 P8.7 R2.1 RST.2 U1.38 | length 2642.5
  Top Layer w10: U1.38 4346.29,2881.29 v1(4350,2885) ; v1(4340,3240) 4340,3249 4555,3464 P8.7 ; v1(5200,3025) 5210,3035 RST.2
  Bottom Layer w10: v1(4340,3240) 4340,2935 4350,2925 v1(4350,2885) 4794.92,2885 4924.92,3015 5019.37,3015 C1.2 5195.63,3020.63 v1(5200,3025)
NetC2_1: C2.1 U1.41 Y1.3 | length 371.3
  Top Layer w10: U1.41 4421.88,2940.34 Y1.3
  Top Layer w30: Y1.3 4509.37,3027.84 C2.1
NetC3_1: C3.1 U1.40 Y1.1 | length 433.7
  Top Layer w10: U1.40 4384.34,2920.66 4420,2885 4550,2885 4570,2905 4575,2910 Y1.1
  Top Layer w30: C3.1 Y1.1@4570,2905
NetC4_1: C4.1 U1.25 U1.56 | length 733.2
  Top Layer w10: U1.25 4045.84,3010.84 4060,3025 v1(4060,3045) 4045.84,3059.16 U1.56
  Bottom Layer w10: C4.1@4034.69,3315 4034.69,3120.31 4060,3095 v1(4060,3045)
NetD1_K: D1.K R1.1
  other v1: 4110,1960
NetD2_K: D2.K R3.1
  other v1: 3880,1964.69
NetD3_K: D3.K R5.1
  other v1: 3955,1965
NetD4_K: D4.K R7.1
  other v1: 4030,1965
NetD5_K: D5.K R8.1
  other v1: 3805,1970
NetD6_A: D6.A R9.1
  other v1: 4188.95,2030.63
NetD8_2: D8.2 D9.4 | length 2643.4
  Bottom Layer w10: v1(5137.8,1678.72) 5248.72,1678.72 5330,1760 5330,1910 5405,1985 5405,3440 5465,3500 5465,3860 v1(5280,4045)
NetD8_4: D8.4 D11.2 | length 2810.4
  Bottom Layer w10: v1(3011.28,1767.8) 3011.28,1758.72 3055,1715 3055,1445 3160,1340 4710,1340 5192.2,1822.2 v1(5192.2,1911.28)
NetD9_2: D9.2 D10.4 | length 2378.5
  Bottom Layer w10: v1(2920,4185) 3175,4440 4705,4440 v1(5050,4095)
PPM: P9.7 U1.15 | length 2005.2
  Top Layer w10: v1(3555,2760) 3695.25,2760 3737.8,2802.55 U1.15
  Bottom Layer w10: v1(3555,2760) 3555,2780 3330,3005 3330,3485 3640,3795 3870,3795 P9.7
PWM1: P9.1 U1.4 | length 1152
  Top Layer w10: P9.1 3440,3690 3710,3420 3710,3038.27 3729.18,3019.08 U1.4
PWM2: P9.2 U1.1 | length 1028.2
  Top Layer w10: P9.2 3540,3630.69 3735,3435.69 3735,3112.26 3769.12,3078.14 U1.1
PWM3: P9.3 U1.60 | length 1485.6
  Top Layer w10: P9.3 3640,3910 3795,3755 4225,3755 4275,3705 4275,3565.25 4110.99,3401.25 4061.25,3401.25 3967.1,3307.1 U1.60
PWM4: P9.4 U1.59 | length 1419.5
  Top Layer w10: P9.4 3740,3910 3860,3790 4223.25,3790 4291,3722.25 4291,3542.75 4133.5,3385.25 4067.87,3385.25 3986.79,3304.16 U1.59
PWM5: P9.5 U1.58 | length 1352.6
  Top Layer w10: P9.5 3840,3908 3921,3827 4223,3827 4307,3743 4307,3527 4149.25,3369.25 4074.5,3369.25 4006.47,3301.22 U1.58
PWM6: P9.6 U1.57 | length 1279.4
  Top Layer w10: P9.6 3940,3918.43 4015.43,3843 4237,3843 4323,3757 4323,3503 4173.25,3353.25 4081.13,3353.25 4026.16,3298.28 U1.57
RGB: IMU1.13 U1.64 | length 411.1
  Top Layer w10: U1.64 3888.36,3408.8 3878,3419.16 3878,3488.25 3896.89,3507.14 IMU1.13
RX0: J1.4 U1.17 | length 1798.5
  Top Layer w10: v1(3850,2585) 3850,2610 3888.36,2648.36 U1.17
  Bottom Layer w10: J1.4 2775,3635 3210,3200 3210,2965 3590,2585 v1(3850,2585) v1@3855,2585
RX1: P2.4 U1.45 | length 1299.2
  Top Layer w10: U1.45 4374.08,3019.08 4400,3045 v1(4435,3045) ; v1(4695,3092.09) 4812.09,3092.09 4890,3170 5255,3170 5335,3090 P2.4
  Bottom Layer w10: v1(4435,3045) 4645,3045 4692.09,3092.09 v1(4695,3092.09)
RX2: P4.4 U1.53 | length 1973.4
  Top Layer w10: P4.4 3665,4320 3740,4245 4315,4245 4395,4165 4395,3525 4104.9,3234.9 U1.53
RX3: P1.4 U1.14 | length 1322.4
  Top Layer w10: P1.4 v1(3380,2910) ; v1(3475,2780) 3484,2789 3701.63,2789 3734.86,2822.23 U1.14
  Bottom Layer w10: v1(3380,2910) 3475,2815 v1(3475,2780)
RX6: P3.4 U1.43 USB1.2 | length 1851.2
  Top Layer w10: U1.43@4280,2980 4375,2980 v1(4370,2975) ; v1(4690,2930.08) 4690,2934.97 4699.97,2925 4762.37,2925 4963.37,2724 5181,2724 v1(5280,2625) 5280,2325 5370,2235 P3.4 ; v1(5330,2665) 5330,2700 5344.41,2714.41 USB1.2
  Bottom Layer w10: v1(4370,2975) 4645.08,2975 v1(4690,2930.08) ; v1(5280,2625) 5290,2625 v1(5330,2665)
RX7: P5.4 U1.9 | length 1422.6
  Top Layer w10: P5.4 3065,3395 3490,2970 3630,2970 3680,2920 3814.87,2920 U1.9
SCL0: P6.3 U1.47 | length 1473.5
  Top Layer w10: U1.47 4333.45,3058.45 4509,3234 5086.63,3234 5292.63,3440 v1(5325,3440) ; v1(5385,3585) 5390,3590 P6.3
  Bottom Layer w10: v1(5325,3440) 5325,3525 v1(5385,3585)
SCL1: P7.3 U1.23 | length 1607.6
  Top Layer w10: P7.3 3795,2400 4006.47,2611.47 U1.23
SDA0: P6.4 U1.48 | length 1394.8
  Top Layer w10: U1.48 4330.51,3078.14 4502.37,3250 5080,3250 5370,3540 P6.4
SDA1: P7.4 U1.24 | length 1654.6
  Top Layer w10: P7.4 v1(3750,2450) ; v1(3850,2410) 4026.16,2586.16 U1.24
  Bottom Layer w10: v1(3750,2450) 3810,2450 v1(3850,2410)
SWCLK: P8.3 U1.52 | length 1366.6
  Top Layer w10: U1.52 4124.58,3231.5 4430,3536.92 4430,4205 4355,4280 P8.3
SWDIO: P8.4 U1.51 | length 1358.4
  Top Layer w10: U1.51 4144.27,3224.24 4455,3534.97 4455,4215 4405,4265 P8.4
TDI: P8.5 U1.50 | length 1342.8
  Top Layer w10: U1.50 4163.95,3218.95 4465,3520 4465,3522.34 4471,3528.34 4471,4259 4455,4275 P8.5
TDO: P8.6 U1.49 | length 1342.1
  Top Layer w10: U1.49 4183.64,3216.01 4505,3537.37 P8.6
TX0: J1.5 U1.18 | length 1735.2
  Top Layer w10: v1@3905.27,2617.78 v1(3908.05,2615) U1.18
  Bottom Layer w10: J1.5 3275.04,3239.96 3275.04,2934.96 3595,2615 v1(3908.05,2615)
TX1: P2.3 U1.46 | length 1301.3
  Top Layer w10: U1.46 4363.77,3038.77 4402.5,3077.5 4410,3070 v1(4410,3078.14) ; v1(4765,3125) 4822.37,3125 4883.37,3186 5261.63,3186 5307.63,3140 P2.3
  Bottom Layer w10: v1(4410,3078.14) 4541.86,3078.14 4550,3070 4590,3070 4645,3125 v1(4765,3125)
TX2: P4.3 U1.10 | length 2189.6
  Top Layer w10: v1(3415,3455) 3415,3785 3285,3915 3285,4135 3405,4255 3565,4255 3615,4305 P4.3 ; v1@3675,2890 3685.97,2900.97 U1.10
  Bottom Layer w10: v1(3415,3455) 3420,3450 3355,3385 3355,3025 3510,2870 3653.82,2870 v1(3673.82,2890)
TX3: P1.3 U1.13 | length 1268.6
  Top Layer w10: P1.3 3415,2860 3470,2805 3695,2805 3731.92,2841.92 U1.13
TX6: P3.3 U1.44 USB1.3 | length 1844.3
  Top Layer w10: U1.44 4411.2,2999.4 v1(4420.6,3008.8) ; v1(4745,2955) 4755,2955 4970,2740 5335,2740 ; USB1.3 5335,2740 ; P3.3 5450,2290 5350,2290 5305,2335 5305,2710 5335,2740
  Bottom Layer w10: v1(4420.6,3008.8) 4691.2,3008.8 v1(4745,2955)
TX7: P5.3 U1.8 | length 1398.1
  Top Layer w10: P5.3 3075,3345 v1(3410,3010) ; v1@3495,3010 v1(3500,3010) 3524,2986 3664,2986 3709.66,2940.34 U1.8
  Bottom Layer w10: v1(3410,3010) v1(3500,3010)
VBAT: C8.1 J2.1 R4.2 U2.1 | length 714.6
  Top Layer w30: J2.1 4285,1835 C8.1
  Bottom Layer w30: R4.2 4285,1665 J2.1
WS2812: D11.4 U1.16 | length 1684.1
  Top Layer w10: D11.4 2760,1840.92 2760,2005.91 v1@3094.09,2340 ; v1(3150.5,2479.5) 3161,2490 3565,2490 3690,2615 3690,2725.82 3747.05,2782.86 U1.16
  Bottom Layer w10: v1(3090,2340) 3090,2419 v1(3150.5,2479.5)
pads on no net: D10.2 IMU1.14 IMU1.Z1 IMU1.Z2 J1.1 J1.6 P1.5 P1.6 P2.5 P2.6 P3.5 P3.6 P4.5 P4.6 P5.5 P5.6 P6.5 P6.6 P7.5 P7.6 P8.8 P8.9 P8.10 U1.20 U1.32 U1.33 U1.36 USB1.4 USB1.6 USB1.7 USB1.8 USB1.9
copper on no net:
  other v1: 1970,3825

## Polygon pours and split planes (outlines as drawn)
GND on Top Layer "GND_L01_P018" (solid, remove dead copper, pour order 18): 2509.3,1552.63 cw(c2509.49,1552.82) 2509.3,1553 2588.62,1632.33 2458.47,1762.48 cw(c2570.01,1874.02) 2412.27,1874.02 2412.27,3987.66 cw(c2570.01,3987.66) 2458.47,4099.2 2588.62,4229.35 2509.3,4308.68 cw(c2509.49,4308.86) 2509.3,4309.05 2648.5,4448.25 cw(c2648.68,4448.06) 2648.87,4448.25 2728.19,4368.93 2858.34,4499.08 cw(c2858.53,4498.89) 2858.39,4499.12 cw(c2969.89,4387.53) 2969.89,4545.28 5083.52,4545.28 cw(c5083.52,4387.53) 5195.07,4499.08 5325.22,4368.92 5404.54,4448.25 cw(c5404.73,4448.06) 5404.92,4448.25 5544.11,4309.05 cw(c5543.92,4308.86) 5544.19,4308.86 cw(c5543.92,4308.86) 5544.11,4308.68 5464.79,4229.35 5594.94,4099.2 cw(c5483.4,3987.66) 5641.14,3987.66 5641.14,1808.79 cw(c5640.88,1808.79) 5641.07,1808.61 5464.79,1632.33 5544.11,1553 cw(c5543.92,1552.82) 5544.19,1552.82 cw(c5543.92,1552.82) 5544.11,1552.63 5404.92,1413.44 cw(c5404.73,1413.62) 5404.54,1413.44 5325.22,1492.76 5195.07,1362.6 cw(c5083.52,1474.15) 5083.52,1316.4 2969.89,1316.4 cw(c2969.89,1474.15) 2858.35,1362.6 2728.19,1492.76 2648.87,1413.44 cw(c2648.68,1413.62) 2648.5,1413.44
5V on Top Layer "5V_L01_P006" (solid, remove dead copper, pour order 6): 4087.55,3525 4087.55,3635 4140,3635 4140,3525
5V on Top Layer "5V_L01_P004" (solid, remove dead copper, pour order 4): 3676.26,1770 3951.26,1770 3951.26,1630 3951.26,1620 3936.26,1620 3676.26,1620
VBAT on Top Layer "VBAT_L01_P000" (solid, remove dead copper, pour order 0): 4370,1360 4365,1365 4365,1595 4010,1595 4006.47,1591.47 4006.47,1525 3655,1525 3655,1360
no net on Bottom Solder "VBAT_L01_P-001" (solid, remove dead copper): 3235,1785 3595,1785 3595,1355 3235,1355
GND on Bottom Layer "GND_L02_P019" (solid, remove dead copper, pour order 19): 2509.3,1552.63 cw(c2509.49,1552.82) 2509.3,1553 2588.62,1632.33 2458.47,1762.48 cw(c2570.01,1874.02) 2412.27,1874.02 2412.27,3987.66 cw(c2570.01,3987.66) 2458.47,4099.2 2588.62,4229.35 2509.3,4308.68 cw(c2509.49,4308.86) 2509.3,4309.05 2648.5,4448.25 cw(c2648.68,4448.06) 2648.87,4448.25 2728.19,4368.93 2858.34,4499.08 cw(c2858.53,4498.89) 2858.39,4499.12 cw(c2969.89,4387.53) 2969.89,4545.28 5083.52,4545.28 cw(c5083.52,4387.53) 5195.07,4499.08 5325.22,4368.92 5404.54,4448.25 cw(c5404.73,4448.06) 5404.92,4448.25 5544.11,4309.05 cw(c5543.92,4308.86) 5544.19,4308.86 cw(c5543.92,4308.86) 5544.11,4308.68 5464.79,4229.35 5594.94,4099.2 cw(c5483.4,3987.66) 5641.14,3987.66 5641.14,1808.79 cw(c5640.88,1808.79) 5641.07,1808.61 5464.79,1632.33 5544.11,1553 cw(c5543.92,1552.82) 5544.19,1552.82 cw(c5543.92,1552.82) 5544.11,1552.63 5404.92,1413.44 cw(c5404.73,1413.62) 5404.54,1413.44 5325.22,1492.76 5195.07,1362.6 cw(c5083.52,1474.15) 5083.52,1316.4 2969.89,1316.4 cw(c2969.89,1474.15) 2858.35,1362.6 2728.19,1492.76 2648.87,1413.44 cw(c2648.68,1413.62) 2648.5,1413.44

## Keep-outs
Keep-Out Layer:
  circle w0.51: c3094.09,1998.23 r59.06
  circle w0.51: c3094.09,3863.43 r59.06
  circle w0.51: c2586.06,4023.5 r59.06
  circle w0.51: c2934.02,4371.5 r59.06
  circle w0.51: c5119.37,4371.5 r59.06
  circle w0.51: c5467.36,4023.5 r59.06
  circle w0.51: c4959.29,3863.43 r59.06
  circle w0.51: c4959.29,1998.23 r59.06
  circle w0.51: c5467.36,1838.15 r59.06
  circle w0.51: c5119.38,1490.18 r59.06
  circle w0.51: c2934.02,1490.2 r59.06
  circle w0.51: c2586.06,1838.15 r59.06
  circle w0.51: c3275.04,2179.17 r98.43
  circle w0.51: c3275.04,3682.48 r98.43
  circle w0.51: c4778.35,3682.48 r98.43
  circle w0.51: c4778.35,2179.17 r98.43

## Silkscreen, mask and mechanical layers (free items; w line width, h text height)
Top Overlay:
  text "G" at 3545,4320 h50 r270
  text "SCL1" at 3590,4320 h50 r270
  text "SDA1" at 3650,4320 h50 r270
  text "V" at 3490,4315 h50 r270
  text "V3" at 4235,4275 h50 r270
  text "G" at 4290,4275 h50 r270
  text "CLK" at 4340,4275 h50 r270
  text "DIO" at 4395,4275 h50 r270
  text "TDI" at 4440,4275 h50 r270
  text "TDO" at 4495,4275 h50 r270
  text "RST" at 4545,4275 h50 r270
  text "2" at 3515,3895 h60 r270
  text "3" at 3620.35,3895 h60 r270
  text "1" at 3415,3890 h60 r270
  text "4" at 3715,3890 h60 r270
  text "PPM" at 4020,3890.2 h60 r270
  text "5" at 3820,3885 h60 r270
  text "6" at 3925,3885 h60 r270
  text "V" at 5307.62,3670 h50
  text "G" at 5307.62,3615 h50
  text "SCL0" at 5307.62,3570 h50
  text "SDA0" at 5307.62,3520 h50
  text "RX7" at 2645.12,3380 h50
  text "TX7" at 2645.12,3320 h50
  text "G" at 2645.12,3275 h50
  text "V" at 5335,3225 h50
  text "V" at 2650.12,3220 h50
  text "G" at 5335,3165 h50
  text "TX1" at 5335,3120 h50
  text "RX1" at 5340,3065 h50
  text "RX3" at 2635,2890 h50
  text "TX3" at 2635,2830 h50
  text "G" at 2635,2785 h50
  text "V" at 2640,2730 h50
  text "SDA1" at 2640,2445 h50
  text "SCL1" at 2640,2385 h50
  text "V" at 5370,2370 h50
  text "G" at 2640,2340 h50
  text "G" at 5370,2315 h50
  text "V" at 2645,2285 h50
  text "TX6" at 5332.1,2265 h50
  text "RX6" at 5337.1,2210 h50
  text "5V" at 4205,2080 h50 r90
  text "3V3" at 4120,2075 h50 r90
Mechanical 1:
  circle w0.51: c3275.06,2179.19 r98.43
  circle w0.51: c4778.36,2179.19 r98.43
  circle w0.51: c4778.36,3682.49 r98.43
  circle w0.51: c3275.06,3682.49 r98.43
  circle w0.51: c4959.31,3863.44 r59.06
  circle w0.51: c5119.38,4371.5 r59.06
  circle w0.51: c5467.37,4023.52 r59.06
  circle w0.51: c4959.31,1998.24 r59.06
  circle w0.51: c5467.37,1838.17 r59.06
  circle w0.51: c5119.38,1490.18 r59.06
  circle w0.51: c3094.11,1998.24 r59.06
  circle w0.51: c2934.03,1490.18 r59.06
  circle w0.51: c2586.05,1838.17 r59.06
  circle w0.51: c3094.11,3863.44 r59.06
  circle w0.51: c2934.03,4371.5 r59.06
  circle w0.51: c2586.05,4023.52 r59.06
  lines w0.5: 2412.53,1874.02 ccw(c2570.01,1874.02) 2458.66,1762.67 ; 2412.53,1874.02 ccw(c2570.01,1874.02) 2458.66,1762.67 ; 2412.53,1874.02 2412.53,3987.66 ; 2412.53,1874.02 2412.53,3987.66 ; 2412.53,3987.66 cw(c2570.01,3987.66) 2458.66,4099.01 ; 2412.53,3987.66 cw(c2570.01,3987.66) 2458.66,4099.01 ; 2458.66,1762.67 2589,1632.33 ; 2458.66,1762.67 2589,1632.33 ; 2458.66,4099.01 2589,4229.35 ; 2458.66,4099.01 2589,4229.35 ; 2509.49,1552.82 2589,1632.33 ; 2509.49,1552.82 2648.68,1413.62 ; 2509.49,1552.82 2589,1632.33 ; 2509.49,1552.82 2648.68,1413.62 ; 2509.49,4308.86 2648.68,4448.06 ; 2509.49,4308.86 2589,4229.35 ; 2509.49,4308.86 2589,4229.35 ; 2509.49,4308.86 2648.68,4448.06 ; 2648.68,1413.62 2728.19,1493.13 ; 2648.68,1413.62 2728.19,1493.13 ; 2648.68,4448.06 2728.19,4368.55 2648.68,4448.06 ; 2728.19,1493.13 2858.53,1362.79 ; 2728.19,1493.13 2858.53,1362.79 ; 2858.53,1362.79 ccw(c2969.89,1474.15) 2969.89,1316.67 ; 2858.53,1362.79 ccw(c2969.89,1474.15) 2969.89,1316.67 ; 2969.89,1316.67 5083.52,1316.67 ; 2969.89,1316.67 5083.52,1316.67 ; 2969.89,4545.01 ccw(c2969.89,4387.53) 2858.53,4498.89 cw(c2969.89,4387.53) 2969.89,4545.01 ; 2969.89,4545.01 5083.52,4545.01 ; 2969.89,4545.01 5083.52,4545.01 ; 5083.52,1316.67 ccw(c5083.52,1474.15) 5194.88,1362.79 ; 5083.52,1316.67 ccw(c5083.52,1474.15) 5194.88,1362.79 ; 5083.52,4545.01 cw(c5083.52,4387.53) 5194.88,4498.89 ; 5083.52,4545.01 cw(c5083.52,4387.53) 5194.88,4498.89 ; 5194.88,1362.79 5325.22,1493.13 ; 5194.88,1362.79 5325.22,1493.13 ; 5194.88,4498.89 5325.22,4368.55 ; 5194.88,4498.89 5325.22,4368.55 ; 5325.22,1493.13 5404.73,1413.62 ; 5325.22,1493.13 5404.73,1413.62 ; 5325.22,4368.55 5404.73,4448.06 ; 5325.22,4368.55 5404.73,4448.06 ; 5404.73,1413.62 5543.92,1552.82 ; 5404.73,1413.62 5543.92,1552.82 ; 5404.73,4448.06 5543.92,4308.86 ; 5404.73,4448.06 5543.92,4308.86 ; 5464.41,1632.33 5543.92,1552.82 ; 5464.41,1632.33 5640.88,1808.79 ; 5464.41,1632.33 5543.92,1552.82 ; 5464.41,4229.35 5594.76,4099.01 ; 5464.41,4229.35 5543.92,4308.86 ; 5464.41,4229.35 5594.76,4099.01 ; 5464.41,4229.35 5543.92,4308.86 ; 5594.76,4099.01 cw(c5483.4,3987.66) 5640.88,3987.66 ; 5594.76,4099.01 cw(c5483.4,3987.66) 5640.88,3987.66 ; 5640.88,1808.79 5640.88,3987.66 ; 5640.88,1808.79 5640.88,3987.66
  lines w0.51: 2728.19,4368.55 2858.53,4498.89 2728.19,4368.55